# Altium PCB STM32_FYP_DAC_Module.PcbDoc
Units mm, origin at the board's own origin, x right, y up, seen from the top; angles counter-clockwise.
Board outline 70 x 65 mm, 2 copper layers (Top Layer, Bottom Layer); 24 components, 31 nets, 138 pads, 185 vias.
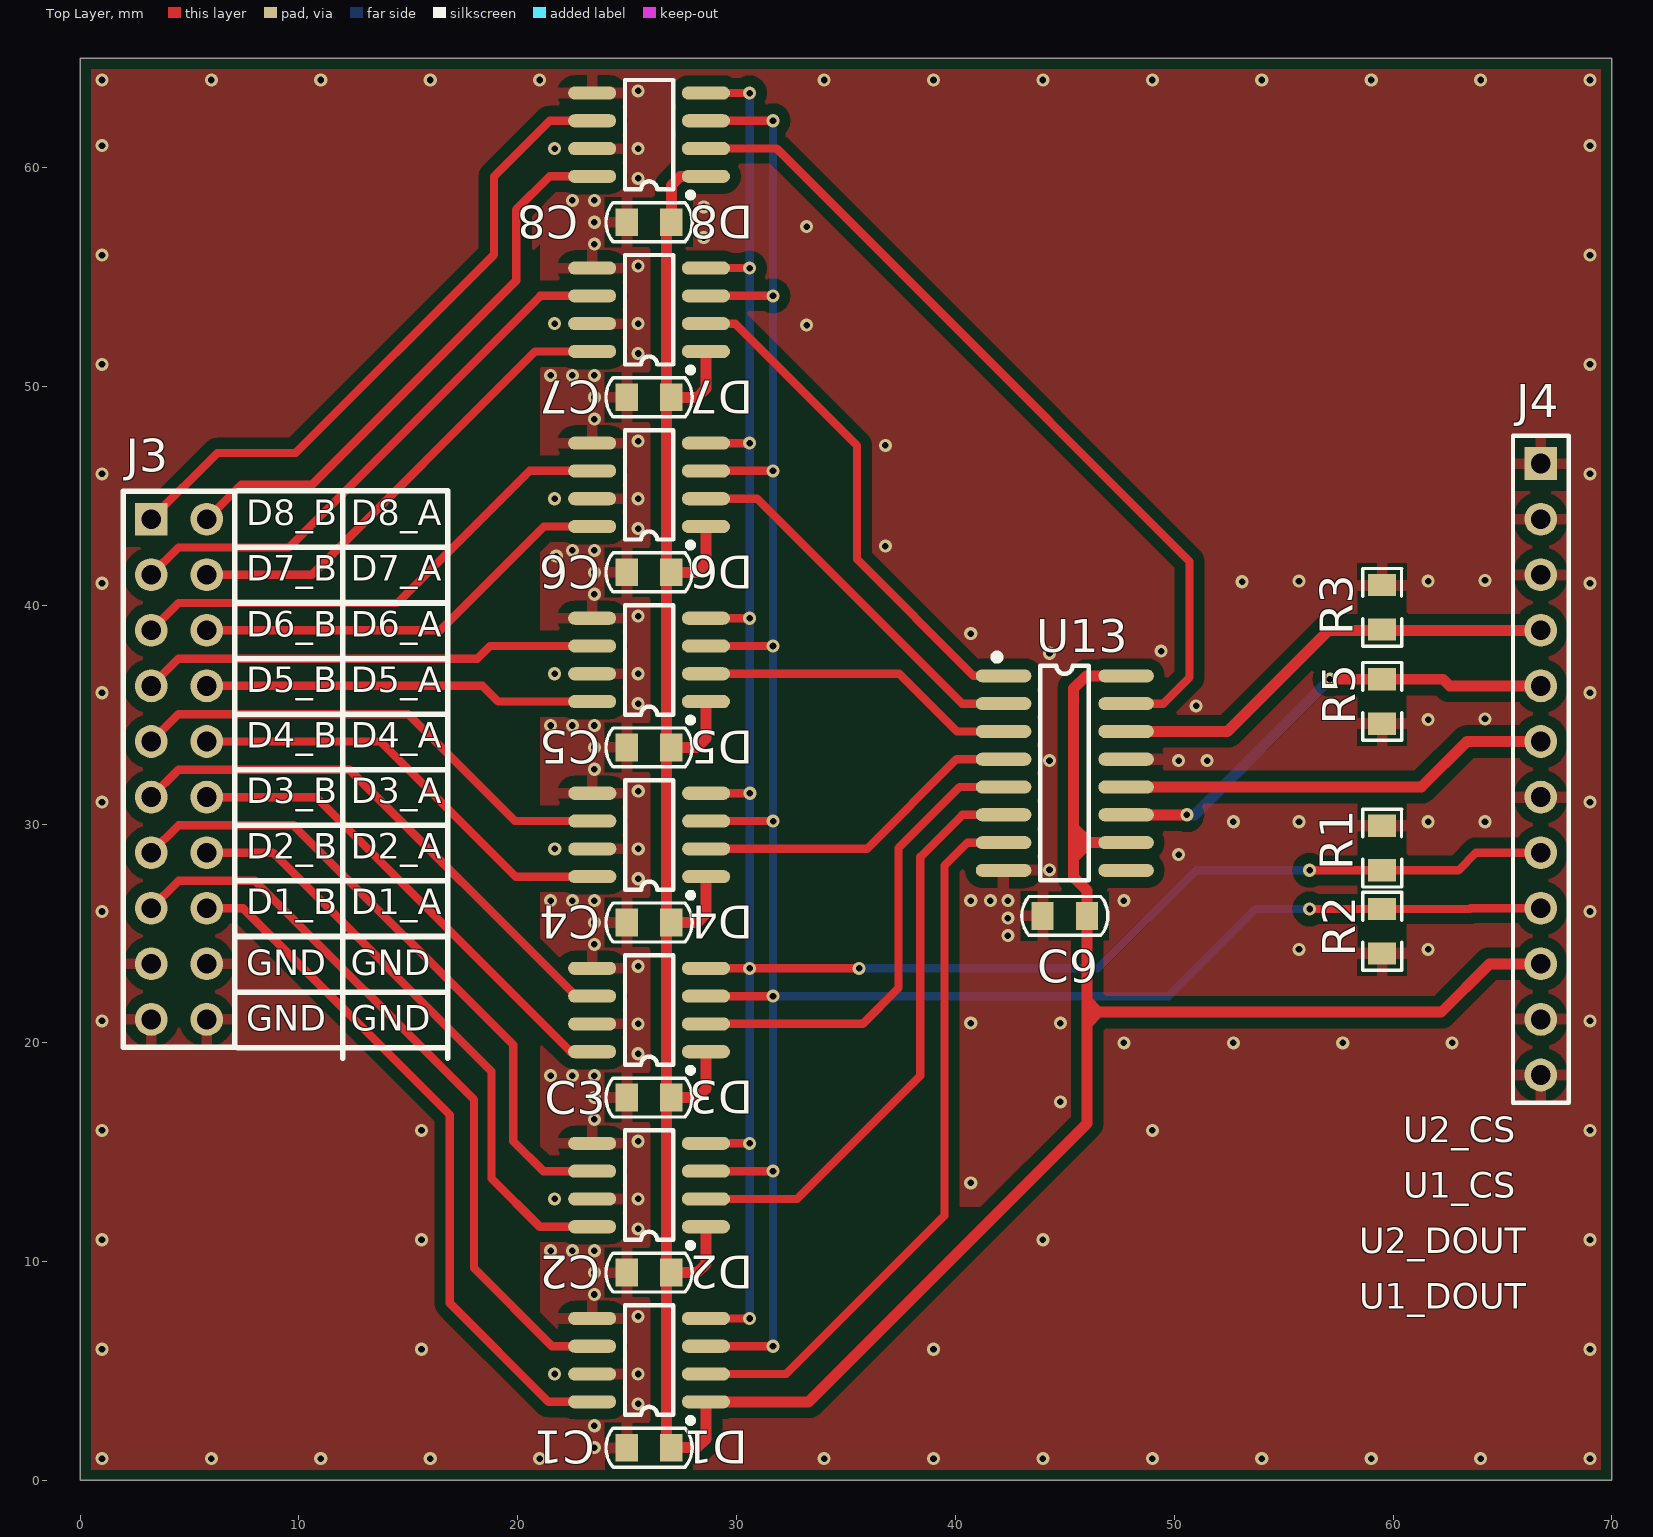
[diagram p0: Top Layer view]
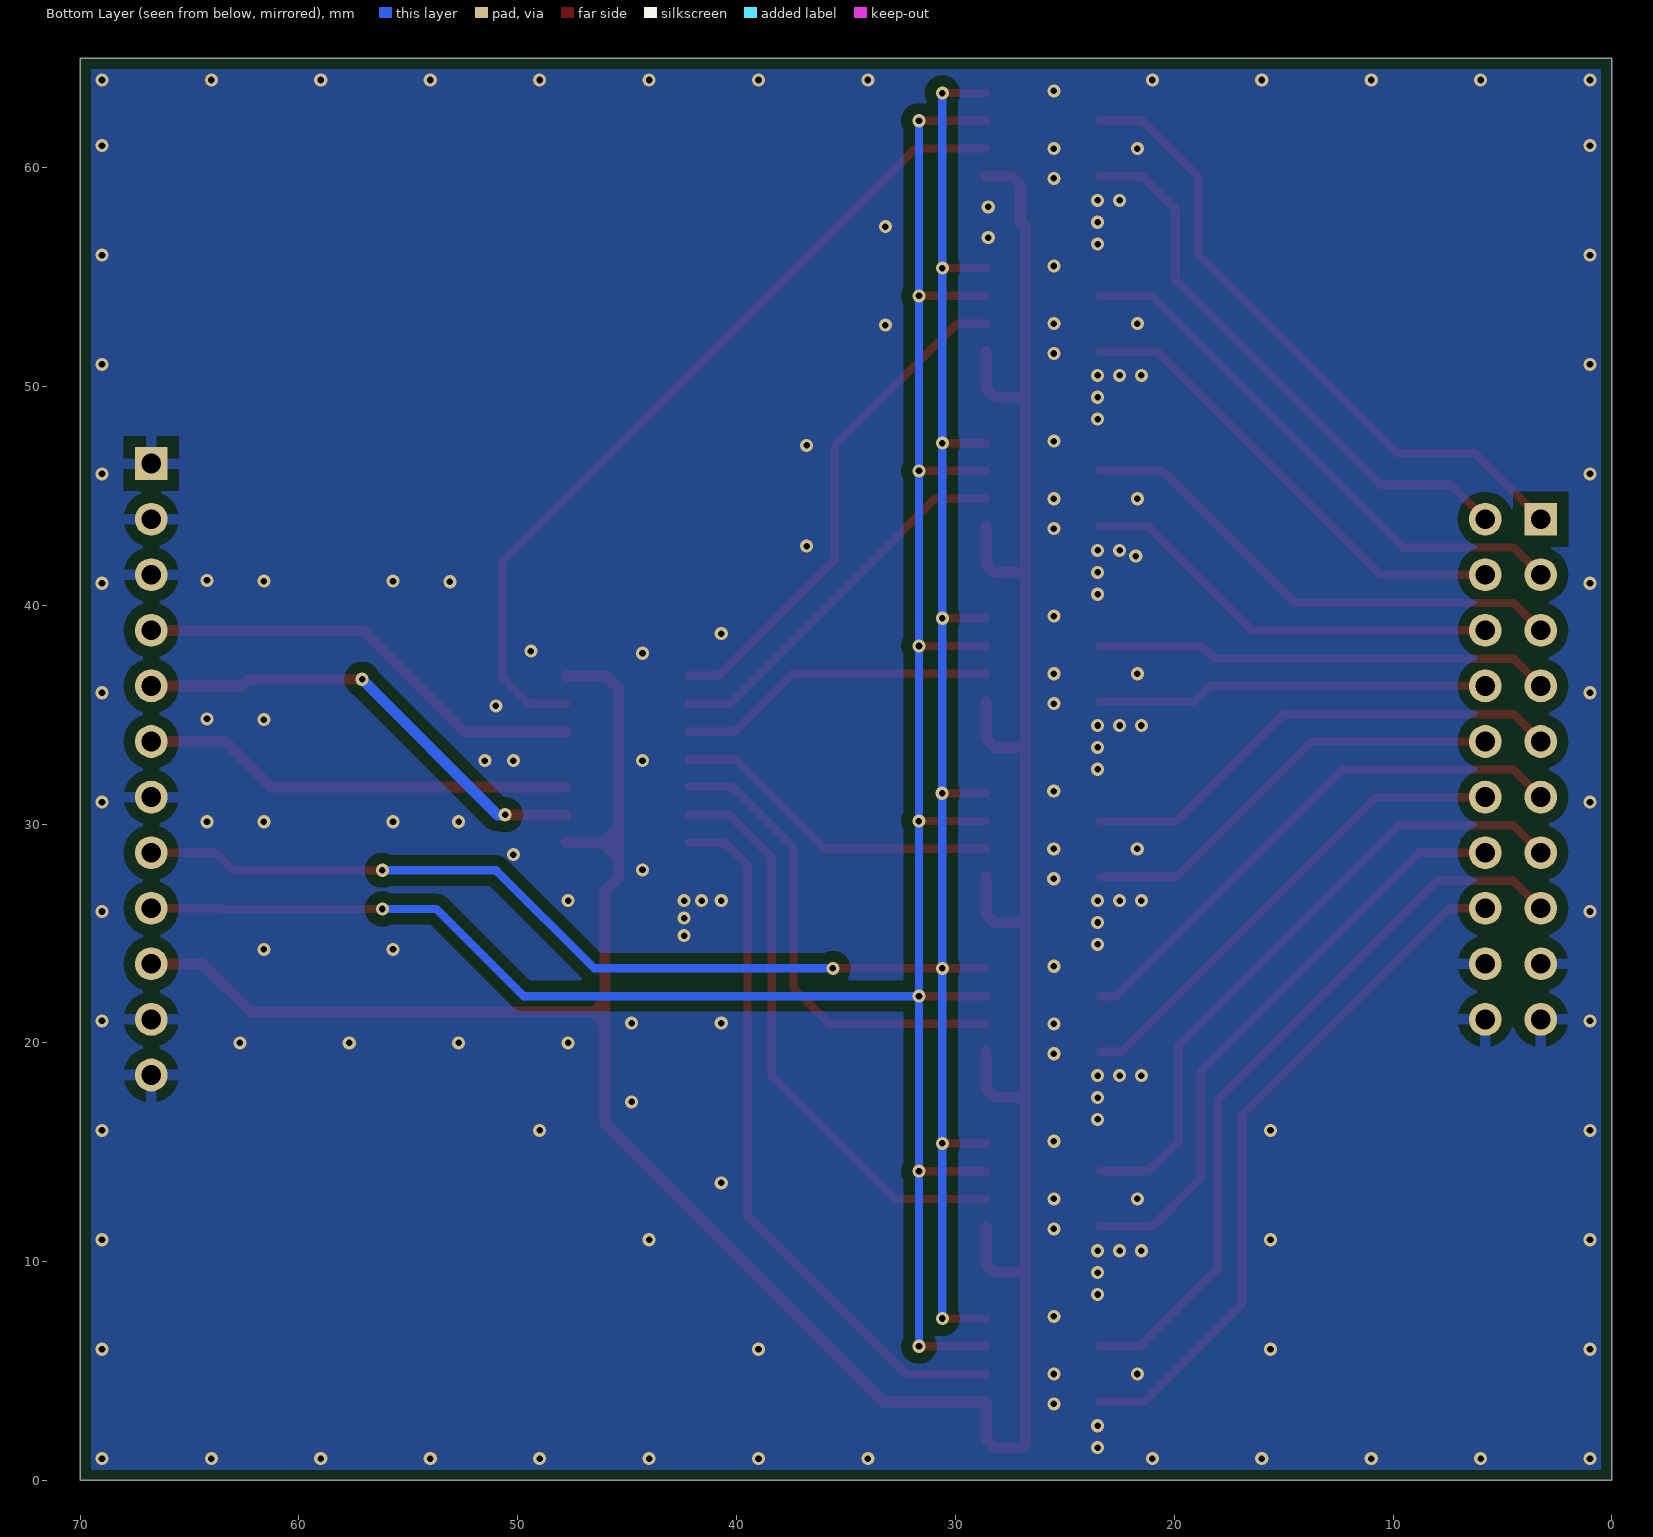
[diagram p1: Bottom Layer view, seen from below]
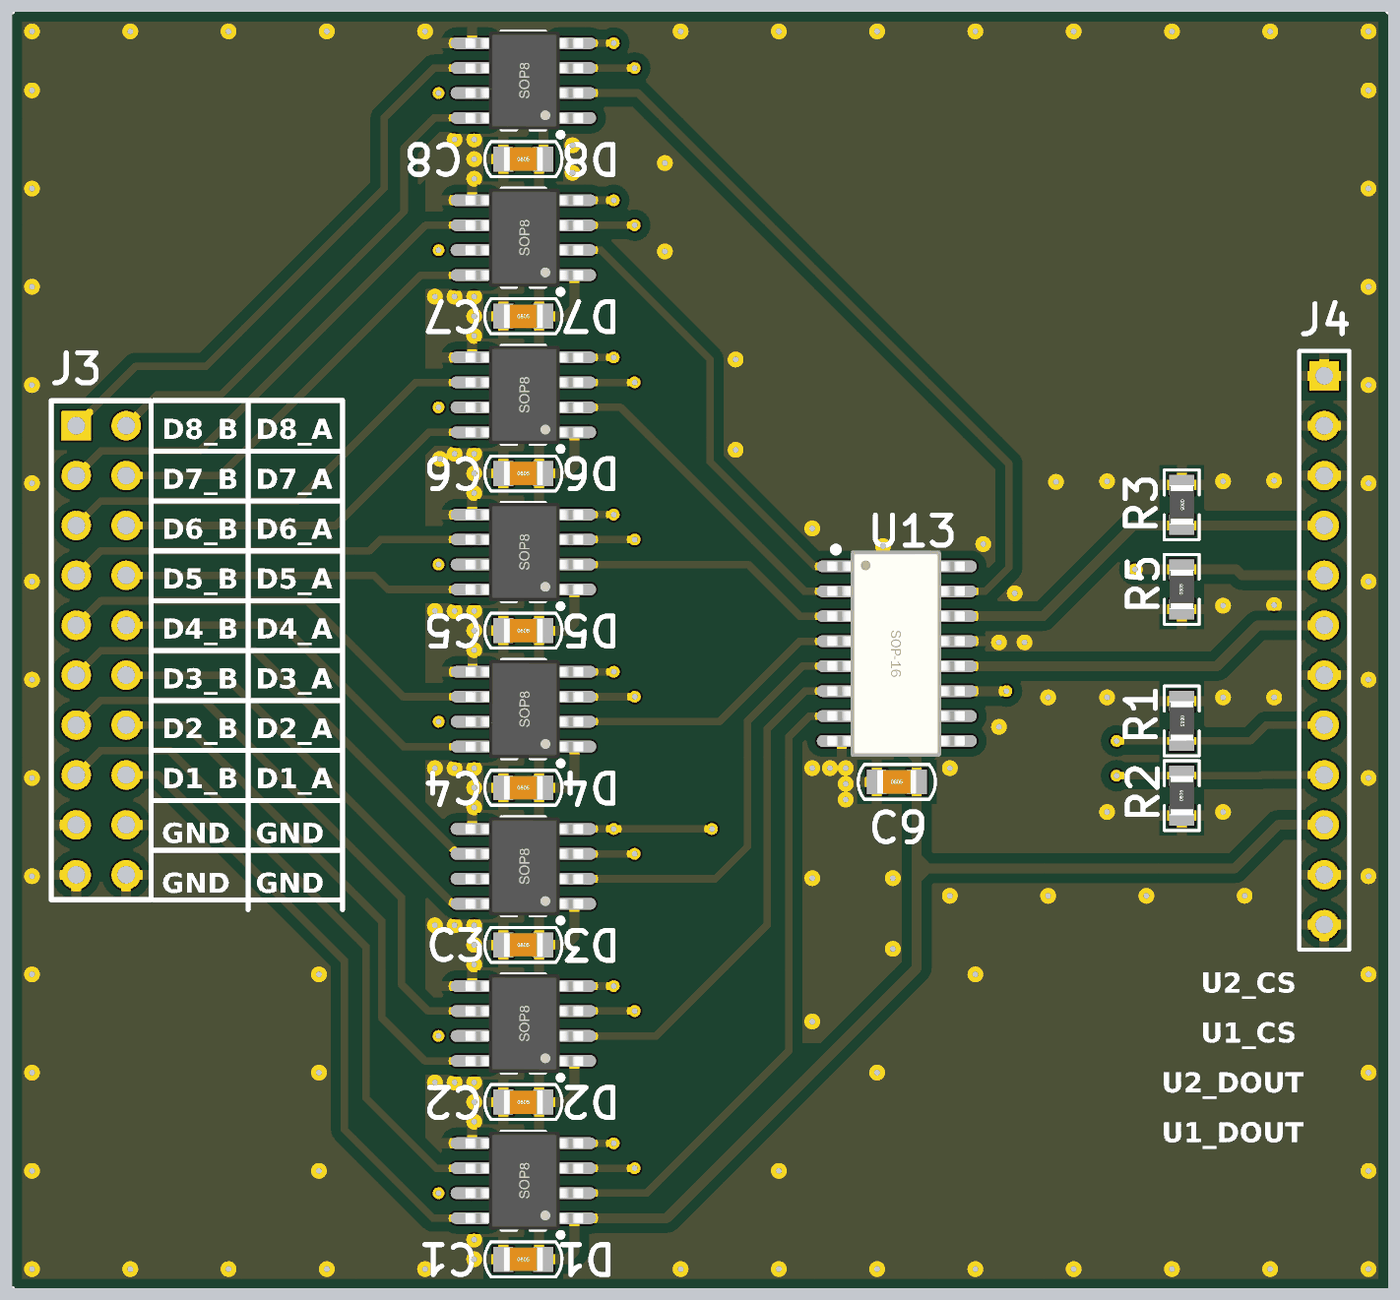
[diagram p2: 3D render of the assembled board from above, using the file's embedded part models]

## Layer stack, top to bottom
Top Solder: solder mask 0.0102, Solder Resist, Dk 3.5
Top Layer: signal copper 0.0356
Dielectric 1: dielectric 0.32, FR-4, Dk 4.8
Bottom Layer: signal copper 0.0356
Bottom Solder: solder mask 0.0102, Solder Resist, Dk 3.5

## Board outline
0,0 0,65 70,65 70,0

## Design rules (kind name [scope] priority, off if disabled: settings)
Clearance Clearance_1 [All vs InPolygon] p1: gap=0.5 ignorepadtopadclearanceinfootprint=FALSE except(0: Arc-Hole Track-Hole SMDPad-Hole THPad-Hole Via-Hole Fill-Hole Poly-Hole Region-Hole Text-Hole)
Clearance [All] p2: gap=0.3 ignorepadtopadclearanceinfootprint=FALSE
ComponentClearance [All] p1: gap=-5 collisioncheckmode=3 verticalgap=0.254 showdistances=FALSE
FabricationTestPointUsage TestPointUsage [All] p1: valid=0 allowmultiple=FALSE
FabricationTestpoint Testpoint [(IsPad And (OnTopLayer Or OnBottomLayer))] p1: side=3 testpointundercomponent=TRUE minsize=1.016 maxsize=2.54 preferedsize=1.524 minholesize=0 maxholesize=1.016 preferedholesize=0.813 testpointgrid=0.025 allowsidetop=TRUE allowsidebottom=TRUE usegrid=TRUE gridtolerance=0
HoleSize [All] p1: absolutevalues=TRUE maxlimit=10 minlimit=0.025 maxpercent=80.000 minpercent=20.000
HoleToHoleClearance [All] p1: gap=0 allowstackedmicrovias=TRUE
MinimumSolderMaskSliver [All] p1: minsoldermaskwidth=0
NetAntennae [All] p1 off: netantennaetolerance=0
PlaneConnect [All] p1: planeconnectstyle=Direct reliefexpansion=0.508 reliefentries=4 reliefconductorwidth=0.254 reliefairgap=0.254
PolygonConnect IsVia [All vs IsVia] p1: connectstyle=Direct reliefconductorwidth=0.508 reliefentries=4 polygonreliefangle="90 Angle" airgapwidth=0.254
PolygonConnect PolygonConnect_1 [All] p2: connectstyle=Relief reliefconductorwidth=0.508 reliefentries=4 polygonreliefangle="90 Angle" airgapwidth=0.5
RoutingVias [All] p1: holewidth=0.4 width=0.7 viastyle="Through Hole" minholewidth=0.3 minwidth=0.6 maxholewidth=1.2 maxwidth=2
SilkToSilkClearance [All] p1: silktosilkclearance=0
SilkToSolderMaskClearance [IsPad] p1: minsilkscreentomaskgap=0 clearancetoexposedcopper=TRUE
SolderMaskExpansion [All] p1: expansion=0.102 istentingtop=FALSE
Width [All] p1: maxlimit=10 minlimit=0.2 preferedwidth=0.6
20 further rules are at their usual default settings.

## Components (designator, comment, footprint, x,y, rotation, side; value= is the part's Value field where it differs from the comment)
C1 "0.1uF" 0805C_M 26,1.5 r0 top
C2 "0.1uF" 0805C_M 26,9.5 r0 top
C3 "0.1uF" 0805C_M 26,17.5 r0 top
C4 "0.1uF" 0805C_M 26,25.5 r0 top
C5 "0.1uF" 0805C_M 26,33.5 r0 top
C6 "0.1uF" 0805C_M 26,41.5 r0 top
C7 "0.1uF" 0805C_M 26,49.5 r0 top
C8 "0.1uF" 0805C_M 26,57.5 r0 top
C9 "0.1uF" 0805C_M 45,25.8 r0 top
D1 "MCP4822-E/SN" SOIC-8_150mil 26,5.5 r180 top
D2 "MCP4822-E/SN" SOIC-8_150mil 26,13.5 r180 top
D3 "MCP4822-E/SN" SOIC-8_150mil 26,21.5 r180 top
D4 "MCP4822-E/SN" SOIC-8_150mil 26.008,29.5 r180 top
D5 "MCP4822-E/SN" SOIC-8_150mil 26,37.5 r180 top
D6 "MCP4822-E/SN" SOIC-8_150mil 26,45.5 r180 top
D7 "MCP4822-E/SN" SOIC-8_150mil 26,53.5 r180 top
D8 "MCP4822-E/SN" SOIC-8_150mil 26,61.5 r180 top
J3 "Header10x2" "10PX2-2.54 - H" 4.52,32.5 r270 top
J4 "Header12" 12P-2.54-H 66.75,46.47 r270 top
R1 "1M" 0805R_M 59.5,28.9 r270 top
R2 "1M" 0805R_M 59.5,25.1 r90 top
R3 "1M" 0805R_M 59.5,39.9 r270 top
R5 "1M" 0805R_M 59.5,35.6 r90 top
U13 "74HC595" SOIC-16_150mil 45,32.325 r0 top

## Footprints (in the part's own frame and the unit in brackets; to place one, negate y for a bottom-side part, rotate by r counter-clockwise, add the part's x,y. Pads: shape width x height; smd on the part's side, far side on the other; paste and mask are expansions set on the pad)
"10PX2-2.54 - H" [mm]
  rect 1.5x1.5 hole 0.9: 1(-11.43,-1.27)
  round 1.5 hole 0.9: 2(-11.43,1.27) 3(-8.89,-1.27) 4(-8.89,1.27) 5(-6.35,-1.27) 6(-6.35,1.27) 7(-3.81,-1.27) 8(-3.81,1.27) 9(-1.27,-1.27) 10(-1.27,1.27) 11(1.27,-1.27) 12(1.27,1.27) 13(3.81,-1.27) 14(3.81,1.27) 15(6.35,-1.27) 16(6.35,1.27) 17(8.89,-1.27) 18(8.89,1.27) 19(11.43,-1.27) 20(11.43,1.27)
  silkscreen extent -12.7,-2.54 12.7,2.54
12P-2.54-H [mm] "Connector; Header; 12Position"
  rect 1.5x1.5 hole 0.9: 1(0,0)
  round 1.5 hole 0.9: 2(2.54,0) 3(5.08,0) 4(7.62,0) 5(10.16,0) 6(12.7,0) 7(15.24,0) 8(17.78,0) 9(20.32,0) 10(22.86,0) 11(25.4,0) 12(27.94,0)
  silkscreen extent -1.27,-1.27 29.21,1.27
0805C_M [mil] "Chip Capacitance, Body 2.0x1.2mm, IPC Low Density"
  rect 40x50 smd: 1(-40,0) 2(40,0)
  silkscreen extent -78,-35 78,35, body extent -39,-24 39,24, height 20
0805R_M [mil] "Chip Resistor, Body 2.0x1.2mm, IPC Low Density"
  rect 40x50 smd: 1(-40,0) 2(40,0)
  silkscreen extent -70,-35 70,35, body extent -39,-25 39,25, height 20
SOIC-8_150mil [mm] "SOIC, 8-Leads, Body 4.8x3.8mm (max), Pitch 1.27mm"
  oval 2.2x0.6 smd: 1(-2.6,1.905) 2(-2.6,0.635) 3(-2.6,-0.635) 4(-2.6,-1.905) 5(2.6,-1.905) 6(2.6,-0.635) 7(2.6,0.635) 8(2.6,1.905)
  silkscreen extent -2.02,-2.5 1.1,2.88, body extent -3.05,-2.5 2.95,2.5, height 1.9
SOIC-16_150mil [mm] "SOIC, 16-Leads, Body 9.9x3.8mm (max), Pitch 1.27mm"
  oval 2.54x0.6 smd: 1(-2.8,4.445) 2(-2.8,3.175) 3(-2.8,1.905) 4(-2.8,0.635) 5(-2.8,-0.635) 6(-2.8,-1.905) 7(-2.8,-3.175) 8(-2.8,-4.445) 9(2.8,-4.445) 10(2.8,-3.175) 11(2.8,-1.905) 12(2.8,-0.635) 13(2.8,0.635) 14(2.8,1.905) 15(2.8,3.175) 16(2.8,4.445)
  silkscreen extent -3.25,-4.9 1.1,5.45, body extent -3.54,-5.25 3.46,5.25, height 1.9

## Part data
C1 C2 C3 C4 C5 C6 C7 C8 C9: library part Cap, "无极性电容", LatestRevisionDate=17-Jul-2002, LatestRevisionNote="Re-released for DXP Platform.", PackageDescription="Radial Cap, Thru-Hole; 2 Leads; 0.3 in Pin Spacing", PackageReference=RAD-0.3, Published=8-Jun-2000, Publisher="Altium Limited"
D1 D2 D3 D4 D5 D6 D7 D8: library part MCP4822, "DAC数模转换芯片"
J4: "12PIN插座"
R1 R2 R3 R5: library part Res, "电阻", LatestRevisionDate=17-Jul-2002, LatestRevisionNote="Re-released for DXP Platform.", PackageDescription="Axial Device, Thru-Hole; 2 Leads; 0.4 in Pin Spacing", PackageReference=AXIAL-0.4, Published=8-Jun-2000, Publisher="Altium Limited"
U13: library part 74LS595, "移位寄存器"

## Via types
v1: diameter 0.6, hole 0.3, Top Layer to Bottom Layer, 185 vias

## Nets (pads, with @x,y where several pads share a name; then routed paths per layer and width w, separated by ;. In a path a pad name is that pad's centre, name@x,y a point inside that pad or via, vN(x,y) a via of type N, cw(c..) or ccw(c..) an arc to the next point about the centre after c; other vN are vias at no path point)
D1_DAC_OUT_A: D1.8 J3.16 | length 32
  Top Layer w0.381: J3.16 7.45,26.15 16.9,16.7 16.9,8.1 21.405,3.595 D1.8
D1_DAC_OUT_B: D1.6 J3.15 | length 34
  Top Layer w0.381: J3.15 4.499,27.399 8.001,27.399 18,17.4 18,9.7 21.565,6.135 D1.6
D2_DAC_OUT_A: D2.8 J3.14 | length 27.6
  Top Layer w0.381: J3.14 8.81,28.69 18.8,18.7 18.8,13.8 21.005,11.595 D2.8
D2_DAC_OUT_B: D2.6 J3.13 | length 29.8
  Top Layer w0.381: J3.13 4.499,29.939 9.761,29.939 19.8,19.9 19.8,15.5 21.165,14.135 D2.6
D3_DAC_OUT_A: D3.8 J3.12 | length 22.4
  Top Layer w0.381: J3.12 10.77,31.23 22.405,19.595 D3.8
D3_DAC_OUT_B: D3.6 J3.11 | length 25
  Top Layer w0.381: J3.11 4.499,32.479 12.321,32.479 22.665,22.135 D3.6
D4_DAC_OUT_A: D4.8 J3.10 | length 20.2
  Top Layer w0.381: J3.10 13.73,33.77 19.905,27.595 D4.8
D4_DAC_OUT_B: D4.6 J3.9 | length 22.7
  Top Layer w0.381: J3.9 4.499,35.019 14.981,35.019 19.865,30.135 D4.6
D5_DAC_OUT_A: D5.8 J3.8 | length 17.9
  Top Layer w0.381: J3.8 18.39,36.31 19.105,35.595 D5.8
D5_DAC_OUT_B: D5.6 J3.7 | length 20.9
  Top Layer w0.381: J3.7 4.499,37.559 18.159,37.559 18.735,38.135 D5.6
D6_DAC_OUT_A: D6.8 J3.6 | length 19.6
  Top Layer w0.381: J3.6 16.45,38.85 21.195,43.595 D6.8
D6_DAC_OUT_B: D6.6 J3.5 | length 23.2
  Top Layer w0.381: J3.5 4.499,40.099 14.499,40.099 20.535,46.135 D6.6
D7_DAC_OUT_A: D7.8 J3.4 | length 21.8
  Top Layer w0.381: J3.4 10.59,41.39 20.795,51.595 D7.8
D7_DAC_OUT_B: D7.6 J3.3 | length 25.4
  Top Layer w0.381: J3.3 4.499,42.639 9.539,42.639 21.035,54.135 D7.6
D8_DAC_OUT_A: D8.8 J3.2 | length 26
  Top Layer w0.381: J3.2 7.368,45.508 10.608,45.508 19.932,54.832 19.932,58.072 21.455,59.595 D8.8
D8_DAC_OUT_B: D8.6 J3.1 | length 29.8
  Top Layer w0.381: J3.1 6.271,46.951 9.851,46.951 18.912,56.012 18.912,59.592 21.455,62.135 D8.6
DS: J4.4 R3.2 U13.14 | length 20.9
  Top Layer w0.5: U13.14 52.43,34.23 57.05,38.85 J4.4
GND: C1.1 C2.1 C3.1 C4.1 C5.1 C6.1 C7.1 C8.1 C9.1 D1.5 D1.7 D2.5 D2.7 D3.5 D3.7 D4.5 D4.7 D5.5 D5.7 D6.5 D6.7 D7.5 D7.7 D8.5 D8.7 J3.17 J3.18 J3.19 J3.20 J4.1 J4.2 J4.3 J4.7 J4.11 J4.12 R1.1 R2.1 R3.1 R5.1 U13.8 U13.13
  other v1: 1,1 6,1 11,1 16,1 21,1 34,1 39,1 44,1 49,1 54,1 59,1 64,1 69,1 23.5,1.5 23.5,2.5 25.5,3.5 21.684,4.865 25.5,4.865 1,6 15.6,6 39,6 69,6 25.5,7.5 23.5,8.5 23.5,9.5 21.5,10.5 22.5,10.5 23.5,10.5 1,11 15.6,11 44,11 69,11 25.5,11.5 21.684,12.865 25.5,12.865 40.7,13.6 25.5,15.5 1,16 15.6,16 49,16 69,16 23.5,16.5 44.8,17.3 23.5,17.5 21.5,18.5 22.5,18.5 23.5,18.5 25.5,19.5 47.7,20 52.7,20 57.7,20 62.7,20 25.5,20.865 40.7,20.9 44.8,20.9 1,21 69,21 25.5,23.5 55.7,24.268 61.6,24.268 23.5,24.5 42.4,24.9 23.5,25.5 42.4,25.7 1,26 69,26 21.5,26.5 22.5,26.5 23.5,26.5 40.7,26.5 41.6,26.5 42.4,26.5 47.7,26.5 25.508,27.5 44.3,27.9 50.2,28.6 21.691,28.865 25.508,28.865 52.7,30.1 55.7,30.1 61.6,30.1 64.2,30.1 1,31 69,31 25.508,31.5 23.5,32.5 44.3,32.9 50.2,32.9 51.5,32.9 23.5,33.5 21.5,34.5 22.5,34.5 23.5,34.5 61.6,34.768 64.2,34.8 51,35.4 25.5,35.5 1,36 69,36 21.684,36.865 25.5,36.865 44.3,37.8 49.4,37.9 40.7,38.7 25.5,39.5 23.5,40.5 1,41 69,41 53.1,41.068 55.7,41.1 61.6,41.1 64.2,41.132 23.5,41.5 21.759,42.241 22.5,42.5 23.5,42.5 36.8,42.7 25.5,43.5 21.684,44.865 25.5,44.865 1,46 69,46 36.8,47.3 25.5,47.5 23.5,48.5 23.5,49.5 21.5,50.5 22.5,50.5 23.5,50.5 1,51 69,51 25.5,51.5 33.2,52.8 21.684,52.865 25.5,52.865 25.5,55.5 1,56 69,56 23.5,56.5 28.5,56.8 33.2,57.3 23.5,57.5 28.5,58.2 22.5,58.5 23.5,58.5 25.5,59.5 21.684,60.865 25.5,60.865 1,61 69,61 25.5,63.5 1,64 6,64 11,64 16,64 21,64 34,64 39,64 44,64 49,64 54,64 59,64 64,64 69,64
NetD1_2: D1.2 U13.7 | length 33
  Top Layer w0.381: D1.2 32.265,4.865 39.5,12.1 39.5,28.1 40.55,29.15 U13.7
NetD2_2: D2.2 U13.6 | length 26.7
  Top Layer w0.381: D2.2 32.765,12.865 38.4,18.5 38.4,28.5 40.32,30.42 U13.6
NetD3_2: D3.2 U13.5 | length 21.8
  Top Layer w0.381: D3.2 35.765,20.865 37.4,22.5 37.4,28.9 40.19,31.69 U13.5
NetD4_2: D4.2 U13.4 | length 15.3
  Top Layer w0.381: D4.2 35.965,28.865 40.06,32.96 U13.4
NetD5_2: D5.2 U13.3 | length 14.7
  Top Layer w0.381: D5.2 37.435,36.865 40.07,34.23 U13.3
NetD6_2: D6.2 U13.2 | length 17.5
  Top Layer w0.381: D6.2 30.935,44.865 40.3,35.5 U13.2
NetD7_2: D7.2 U13.1 | length 23.3
  Top Layer w0.381: D7.2 29.935,52.865 35.5,47.3 35.5,42.1 40.83,36.77 U13.1
NetD8_2: D8.2 U13.15 | length 38.6
  Top Layer w0.381: D8.2 31.835,60.865 37.982,54.718 50.7,42 50.7,36.7 49.5,35.5 U13.15
SCK: D1.3 D2.3 D3.3 D4.3 D5.3 D6.3 D7.3 D8.3 J4.9 R2.2 | length 117.3
  Top Layer w0.381: D1.3 v1(31.665,6.135) ; D2.3 v1(31.665,14.135) ; D3.3 v1(31.665,22.135) ; D5.3 v1(31.665,38.135) ; D6.3 v1(31.665,46.135) ; D7.3 v1(31.665,54.135) ; D8.3 v1(31.665,62.135) ; D4.3 v1(31.673,30.135) ; v1(56.184,26.116) R2.2 63.516,26.116 63.55,26.15 J4.9
  Bottom Layer w0.381: v1(31.665,6.135) v1(31.665,14.135) v1(31.665,22.135) ; v1(31.665,62.135) v1(31.665,54.135) v1(31.665,46.135) v1(31.665,38.135) v1(31.665,22.135) ; v1(56.184,26.116) 53.716,26.116 49.735,22.135 v1(31.665,22.135)
SDI: D1.4 D2.4 D3.4 D4.4 D5.4 D6.4 D7.4 D8.4 J4.8 R1.2 | length 110.3
  Top Layer w0.381: D1.4 30.595,7.405 v1(30.598,7.403) v1@30.6,7.4 ; D2.4 30.595,15.405 v1(30.598,15.403) ; D3.4 30.595,23.405 v1(30.598,23.403) 35.597,23.403 v1@35.6,23.4 ; D5.4 30.595,39.405 v1(30.598,39.403) ; D6.4 30.595,47.405 v1(30.598,47.403) ; D7.4 30.595,55.405 v1(30.598,55.403) ; D8.4 30.595,63.405 v1(30.598,63.403) v1@30.6,63.4 ; D4.4 30.603,31.405 v1(30.605,31.403) ; v1(56.184,27.884) R1.2 62.984,27.884 63.79,28.69 J4.8
  Bottom Layer w0.381: v1(30.598,7.403) v1(30.598,15.403) v1(30.598,23.403) v1(30.598,39.403) v1(30.598,47.403) v1(30.598,55.403) v1(30.598,63.403) ; v1(35.599,23.401) 46.501,23.401 50.984,27.884 v1(56.184,27.884)
SH_CP: J4.5 R5.2 U13.11 | length 21.6
  Top Layer w0.5: U13.11 v1(50.58,30.42) ; v1(57.116,36.616) R5.2 62.284,36.616 62.59,36.31 J4.5
  Bottom Layer w0.5: v1(50.58,30.42) 50.92,30.42 v1(57.116,36.616)
ST_CP: J4.6 U13.12 | length 19.8
  Top Layer w0.5: U13.12 61.29,31.69 63.37,33.77 J4.6
VCC: C1.2 C2.2 C3.2 C4.2 C5.2 C6.2 C7.2 C8.2 C9.2 D1.1 D2.1 D3.1 D4.1 D5.1 D6.1 D7.1 D8.1 J4.10 U13.10 U13.16 | length 156.8
  Top Layer w0.5: C2.2 28.2,9.5 28.6,9.9 D2.1 ; C3.2 28.2,17.5 28.6,17.9 D3.1 ; C5.2 28.2,33.5 28.6,33.9 D5.1 ; C6.2 28.2,41.5 28.6,41.9 D6.1 ; C7.2 28.2,49.5 28.6,49.9 D7.1 ; C4.2@27.024,25.5 28.208,25.5 28.608,25.9 D4.1 ; D8.1 27.425,59.595 27.016,59.186 C8.2 26.8,57.284 26.8,1.716 C1.2 28.2,1.5 28.6,1.9 D1.1 33.295,3.595 46.016,16.316 46.016,21.4 ; 45.4,28.448 46.102,29.15 45.4,29.852 ; 46.016,20.866 46.55,21.4 46.016,21.934 ; U13.10 45.515,29.15 45.4,29.035 ; U13.16 45.981,36.77 45.4,36.189 45.4,29.035 ; J4.10 64.41,23.61 62.2,21.4 46.016,21.4 ; 45.4,29.035 45.4,27.584 46.016,26.968 C9.2 46.016,21.4
pads on no net: U13.9

## Polygon pours and split planes (outlines as drawn)
GND on Top Layer "NONET_L-01_P-001" (solid, remove dead copper, pour order 0): 69.5,0.5 69.5,64.5 0.5,64.5 0.5,0.5
GND on Bottom Layer "NONET_L-01_P-001" (solid, pour order 1): 69.5,0.5 69.5,64.5 0.5,64.5 0.5,0.5

## Other copper
Top Layer:
  pour cut-out: 21,56.464 21,4 20.5,3.5 16.6,7.4 16.6,52.064
  pour cut-out: 39.9,12.5 41.4,12.5 40.9,12 40.9,10.8 40.1,10.8 39.4,11.5

## Silkscreen, mask and mechanical layers (free items; w line width, h text height)
Top Overlay:
  lines w0.254: 7.2,19.779 16.777,19.779 ; 7.2,22.319 16.777,22.319 ; 7.2,24.859 16.777,24.859 ; 7.2,27.399 16.777,27.399 ; 7.2,29.939 16.777,29.939 ; 7.2,32.479 16.777,32.479 ; 7.2,35.019 16.777,35.019 ; 7.2,37.559 16.777,37.559 ; 7.2,40.099 16.777,40.099 ; 7.2,42.639 16.777,42.639 ; 7.2,45.221 16.777,45.221 ; 11.998,19.301 11.998,45.221 ; 16.796,19.301 16.796,45.221
  text "D8_B" at 7.6,43.259 h2
  text "D8_A" at 12.378,43.259 h2
  text "D7_B" at 7.6,40.719 h2
  text "D7_A" at 12.378,40.719 h2
  text "D6_B" at 7.6,38.179 h2
  text "D6_A" at 12.378,38.179 h2
  text "D5_B" at 7.6,35.639 h2
  text "D5_A" at 12.378,35.639 h2
  text "D4_B" at 7.6,33.099 h2
  text "D4_A" at 12.378,33.099 h2
  text "D3_B" at 7.6,30.559 h2
  text "D3_A" at 12.378,30.559 h2
  text "D2_B" at 7.6,28.019 h2
  text "D2_A" at 12.378,28.019 h2
  text "D1_B" at 7.6,25.479 h2
  text "D1_A" at 12.378,25.479 h2
  text "GND" at 7.6,22.695 h2
  text "GND" at 12.378,22.695 h2
  text "CLK" at 100.461,22.539 h2
  text "GND" at 7.6,20.155 h2
  text "GND" at 12.378,20.155 h2
  text "DGND" at 100.46,19.992 h2
  text "DIN" at 100.46,17.437 h2
  text "U2_CS" at 60.461,15.076 h2
  text "VDD" at 100.461,14.897 h2
  text "U1_CS" at 60.461,12.536 h2
  text "VREF" at 100.461,12.357 h2
  text "U2_DOUT" at 58.461,9.996 h2
  text "U1_DOUT" at 58.461,7.456 h2
  text "DGND" at 100.46,-0.328 h2
  text "DGND" at 100.46,-2.868 h2
Mechanical 1:
  the board outline again, w0.254

## Dimensions
0,65 to 0,0 on Top Overlay
0,65 to 70,65 on Top Overlay